# Altium PCB POWR0011_BCR_PROTOTYPE.PcbDoc (part 2 of 2)
Units mil, origin at the board's own origin, x right, y up, seen from the top; angles counter-clockwise.
Board outline 7874.02 x 3346.46 mil, 4 copper layers (Top Layer, Internal Plane 1, Internal Plane 2, Bottom Layer); 193 components, 127 nets, 685 pads, 316 vias.
Unrouted connection lines stored in the file: 1.
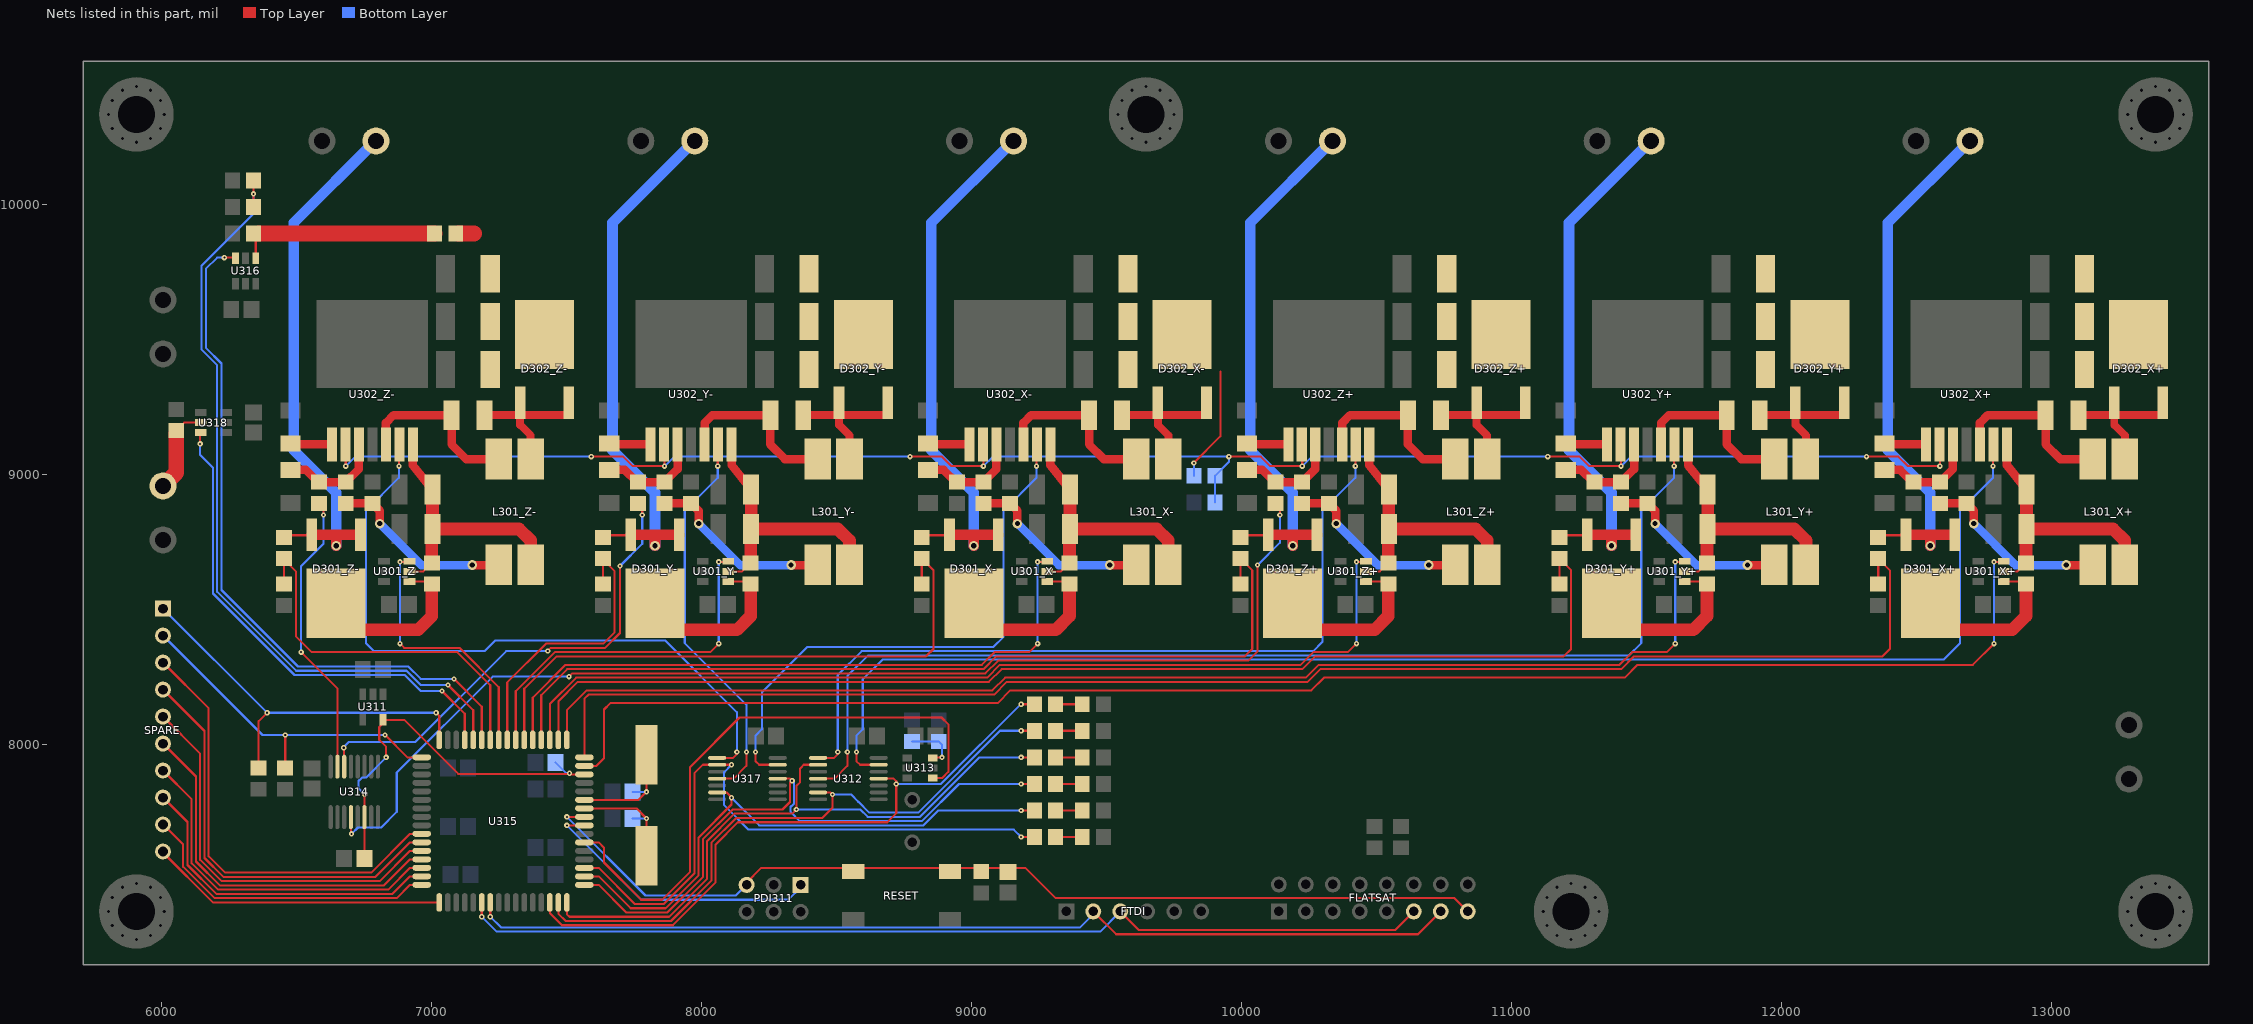
[diagram p4: the nets of this part, all layers, seen from the top]

## Via types
v1: diameter 19.68, hole 7.87, Top Layer to Bottom Layer, tented both sides, 194 vias
v2: diameter 35.43, hole 19.68, Top Layer to Bottom Layer, tented both sides, 66 vias
v3: diameter 19.68, hole 11.81, Top Layer to Bottom Layer, tented bottom, 54 vias
v4: diameter 19.68, hole 7.87, Top Layer to Bottom Layer, 2 vias

## Nets (pads, with @x,y where several pads share a name; then routed paths per layer and width w, separated by ;. In a path a pad name is that pad's centre, name@x,y a point inside that pad or via, vN(x,y) a via of type N, cw(c..) or ccw(c..) an arc to the next point about the centre after c; other vN are vias at no path point) (continued)
I_SET_Y-: R306_Y-.2 U314.14 | length 1772.1
  Top Layer w7.87: v1(6673.82,7988.19) 6675.1,7986.91 U314.14@6675.1,7918.31 ; v1(7429.13,8346.46) 7440.94,8358.27 7641.73,8358.27 7696.85,8413.39 v1(7696.85,8661.42) ; v1(7779.53,8850.39) R306_Y-.2@7779.53,8879.92
  Bottom Layer w7.87: v1(6673.82,7988.19) 6673.82,7991.25 6692.41,8009.84 6938.98,8009.84 7275.59,8346.46 v1(7429.13,8346.46) ; v1(7696.85,8661.42) 7779.53,8744.09 v1(7779.53,8850.39)
I_SET_Z+: R306_Z+.2 U314.4 | length 4357
  Top Layer w7.87: U314.4@6700.1,7731.3 6700.1,7671.85 v1(6702.66,7669.29) ; v1(7507.87,8251.97) 7519.68,8263.78 9050.45,8263.78 9097.69,8311.02 10023.9,8311.02 10059.06,8346.18 v1(10059.06,8665.35) ; v1(10141.73,8850.39) R306_Z+.2@10141.73,8879.92
  Bottom Layer w7.87: v1(6702.66,7669.29) 6726.28,7692.91 6812.12,7692.91 6870.08,7750.87 6870.08,7896.4 7225.64,8251.97 v1(7507.87,8251.97) ; v1(10059.06,8665.35) 10141.73,8748.03 v1(10141.73,8850.39) v1@10141.73,8854.33
I_SET_Z-: R306_Z-.2 U314.15 | length 1051.5
  Top Layer w7.87: v1(6515.75,8342.52) 6650.1,8208.17 U314.15@6650.1,7918.31 ; v1(6598.43,8850.39) R306_Z-.2@6598.43,8879.92
  Bottom Layer w7.87: v1(6515.75,8342.52) 6515.75,8661.42 6598.43,8744.09 v1(6598.43,8850.39)
ISENSE_BCR: U315.11 U316.6 | length 2607.9
  Top Layer w7.87: v1(6231.3,9804.13) 6270.67,9804.13 U316.6@6272.64,9802.17 ; v1(7081.94,8243.36) 7185.04,8140.27 U315.11@7185.04,8017.72
  Bottom Layer w7.87: v1(6231.3,9804.13) 6204.36,9804.13 6162.71,9762.49 6162.71,9469.8 6220.47,9412.03 6220.47,8572.83 6503.94,8289.37 6912.65,8289.37 6958.66,8243.36 v1(7081.94,8243.36)
ISENSE_LOAD: U315.13 U318.6 | length 1830.2
  Top Layer w7.87: v1(6141.73,9114.17) 6141.73,9153.54 U318.6@6143.7,9155.51 ; v1(7037.4,8198.82) 7122.05,8114.17 U315.13@7122.05,8017.72
  Bottom Layer w7.87: v1(6141.73,9114.17) 6141.73,9072.83 6188.98,9025.59 6188.98,8559.79 6490.89,8257.87 6899.61,8257.87 6958.66,8198.82 v1(7037.4,8198.82)
ISENSE_X+: U301_X+.6 U315.63 | length 5848.7
  Top Layer w7.87: U315.63@7564.96,7921.26 7610.24,7921.26 7637.8,7948.82 7637.8,8129.92 7661.42,8153.54 9096.11,8153.54 9143.35,8200.79 10257.64,8200.79 10304.89,8248.03 11419.18,8248.03 11466.42,8295.28 12708.66,8295.28 v1(12787.4,8374.02) ; v1(12787.4,8677.17) U301_X+.6@12816.93,8677.17
  Bottom Layer w7.87: v1(12787.4,8374.02) v1(12787.4,8677.17)
ISENSE_X-: U301_X-.6 U315.5 | length 2441.9
  Top Layer w7.87: U315.5@7374.02,8017.72 7374.02,8174.1 7495.19,8295.28 9037.4,8295.28 9084.65,8342.52 9212.6,8342.52 v1(9244.09,8374.02) ; v1(9244.09,8677.17) U301_X-.6@9273.62,8677.17
  Bottom Layer w7.87: v1(9244.09,8374.02) v1(9244.09,8677.17)
ISENSE_Y+: U301_Y+.6 U315.1 | length 4650.5
  Top Layer w7.87: U315.1@7500,8017.72 7500,8126.86 7573.93,8200.79 9076.54,8200.79 9123.78,8248.03 10238.07,8248.03 10285.32,8295.28 11399.61,8295.28 11446.85,8342.52 11574.8,8342.52 v1(11606.3,8374.02) ; v1(11606.3,8677.17) U301_Y+.6@11635.83,8677.17
  Bottom Layer w7.87: v1(11606.3,8374.02) v1(11606.3,8677.17)
ISENSE_Y-: U301_Y-.6 U315.7 | length 1337.7
  Top Layer w7.87: U315.7@7311.02,8017.72 7311.02,8197.72 7455.82,8342.52 8031.5,8342.52 v1(8062.99,8374.02) ; v1(8062.99,8677.17) U301_Y-.6@8092.52,8677.17
  Bottom Layer w7.87: v1(8062.99,8374.02) v1(8062.99,8677.17)
ISENSE_Z+: U301_Z+.6 U315.3 | length 3546.2
  Top Layer w7.87: U315.3@7437.01,8017.72 7437.01,8150.48 7534.56,8248.03 9056.97,8248.03 9104.21,8295.28 10218.5,8295.28 10265.75,8342.52 10393.7,8342.52 v1(10425.2,8374.02) ; v1(10425.2,8677.17) U301_Z+.6@10454.72,8677.17
  Bottom Layer w7.87: v1(10425.2,8374.02) v1(10425.2,8677.17)
ISENSE_Z-: U301_Z-.6 U315.9 | length 960.6
  Top Layer w7.87: v1(6881.89,8374.02) 6897.64,8358.27 7102.36,8358.27 7248.03,8212.6 U315.9@7248.03,8017.72 ; v1(6881.89,8677.17) U301_Z-.6@6911.42,8677.17
  Bottom Layer w7.87: v1(6881.89,8374.02) v1(6881.89,8677.17)
LOAD: LOAD.1 R318.1 U318.5 | length 318.4
  Top Layer w7.87: R318.1@6053.15,9163.39 6082.68,9192.91 U318.5@6143.7,9192.91
  Top Layer w59.06: LOAD.1@6003.94,8958.27 6053.15,9007.48 R318.1@6053.15,9153.54
NetC301_X+_1: C301_X+.1 C302_X+.1 L301_X+.2 R301_X+.1 U301_X+.5 U302_X+.7 | length 1032.7
  Top Layer w7.87: U301_X+.5@12822.83,8641.73 12874.02,8641.73 R301_X+.1@12905.51,8673.23
  Top Layer w31.5: U302_X+.7@12835.04,9112.2 12835.04,9035.04 C302_X+.1@12907.48,8944.88
  Top Layer w47.24: R301_X+.1@12905.51,8673.23 12905.51,8797.24 C301_X+.1@12907.48,8799.21 ; C302_X+.1@12907.48,8944.88 C301_X+.1@12907.48,8799.21 ; L301_X+.2@13271.65,8666.34 13271.65,8755.91 13228.35,8799.21 C301_X+.1@12907.48,8799.21
NetC301_X-_1: C301_X-.1 C302_X-.1 L301_X-.2 R301_X-.1 U301_X-.5 U302_X-.7 | length 1032.7
  Top Layer w7.87: U301_X-.5@9279.53,8641.73 9330.71,8641.73 R301_X-.1@9362.2,8673.23
  Top Layer w31.5: U302_X-.7@9291.73,9112.2 9291.73,9035.04 C302_X-.1@9364.17,8944.88
  Top Layer w47.24: R301_X-.1@9362.2,8673.23 9362.2,8797.24 C301_X-.1@9364.17,8799.21 ; C302_X-.1@9364.17,8944.88 C301_X-.1@9364.17,8799.21 ; L301_X-.2@9728.35,8666.34 9728.35,8755.91 9685.04,8799.21 C301_X-.1@9364.17,8799.21
NetC301_Y+_1: C301_Y+.1 C302_Y+.1 L301_Y+.2 R301_Y+.1 U301_Y+.5 U302_Y+.7 | length 1032.7
  Top Layer w7.87: U301_Y+.5@11641.73,8641.73 11692.91,8641.73 R301_Y+.1@11724.41,8673.23
  Top Layer w31.5: U302_Y+.7@11653.94,9112.2 11653.94,9035.04 C302_Y+.1@11726.38,8944.88
  Top Layer w47.24: R301_Y+.1@11724.41,8673.23 11724.41,8797.24 C301_Y+.1@11726.38,8799.21 ; C302_Y+.1@11726.38,8944.88 C301_Y+.1@11726.38,8799.21 ; L301_Y+.2@12090.55,8666.34 12090.55,8755.91 12047.24,8799.21 C301_Y+.1@11726.38,8799.21
NetC301_Y-_1: C301_Y-.1 C302_Y-.1 L301_Y-.2 R301_Y-.1 U301_Y-.5 U302_Y-.7 | length 1032.7
  Top Layer w7.87: U301_Y-.5@8098.43,8641.73 8149.61,8641.73 R301_Y-.1@8181.1,8673.23
  Top Layer w31.5: U302_Y-.7@8110.63,9112.2 8110.63,9035.04 C302_Y-.1@8183.07,8944.88
  Top Layer w47.24: R301_Y-.1@8181.1,8673.23 8181.1,8797.24 C301_Y-.1@8183.07,8799.21 ; C302_Y-.1@8183.07,8944.88 C301_Y-.1@8183.07,8799.21 ; L301_Y-.2@8547.24,8666.34 8547.24,8755.91 8503.94,8799.21 C301_Y-.1@8183.07,8799.21
NetC301_Z+_1: C301_Z+.1 C302_Z+.1 L301_Z+.2 R301_Z+.1 U301_Z+.5 U302_Z+.7 | length 1032.7
  Top Layer w7.87: U301_Z+.5@10460.63,8641.73 10511.81,8641.73 R301_Z+.1@10543.31,8673.23
  Top Layer w31.5: U302_Z+.7@10472.83,9112.2 10472.83,9035.04 C302_Z+.1@10545.28,8944.88
  Top Layer w47.24: R301_Z+.1@10543.31,8673.23 10543.31,8797.24 C301_Z+.1@10545.28,8799.21 ; C302_Z+.1@10545.28,8944.88 C301_Z+.1@10545.28,8799.21 ; L301_Z+.2@10909.45,8666.34 10909.45,8755.91 10866.14,8799.21 C301_Z+.1@10545.28,8799.21
NetC301_Z-_1: C301_Z-.1 C302_Z-.1 L301_Z-.2 R301_Z-.1 U301_Z-.5 U302_Z-.7 | length 1032.7
  Top Layer w7.87: U301_Z-.5@6917.32,8641.73 6968.5,8641.73 R301_Z-.1@7000,8673.23
  Top Layer w31.5: U302_Z-.7@6929.53,9112.2 6929.53,9035.04 C302_Z-.1@7001.97,8944.88
  Top Layer w47.24: R301_Z-.1@7000,8673.23 7000,8797.24 C301_Z-.1@7001.97,8799.21 ; C302_Z-.1@7001.97,8944.88 C301_Z-.1@7001.97,8799.21 ; L301_Z-.2@7366.14,8666.34 7366.14,8755.91 7322.83,8799.21 C301_Z-.1@7001.97,8799.21
NetC303_X+_1: C303_X+.1 D302_X+.1 L301_X+.3 | length 536.8
  Top Layer w29.53: C303_X+.1@13100.39,9220.47 D302_X+.1@13232.68,9220.47 ; D302_X+.1@13232.68,9265.75 D302_X+.1@13232.68,9220.47 ; L301_X+.3@13271.65,9058.07 13271.65,9145.67 13232.68,9184.65 D302_X+.1@13232.68,9220.47 ; D302_X+.1@13413.39,9220.47 D302_X+.1@13232.68,9220.47
NetC303_X+_2: C303_X+.2 L301_X+.4 U302_X+.5 | length 640.6
  Top Layer w31.5: U302_X+.5@12735.04,9112.2 12735.04,9191.73 12763.78,9220.47 C303_X+.2@12978.35,9220.47 12978.35,9112.2 13032.48,9058.07 L301_X+.4@13153.54,9058.07
NetC303_X-_1: C303_X-.1 D302_X-.1 L301_X-.3 | length 536.8
  Top Layer w29.53: C303_X-.1@9557.09,9220.47 D302_X-.1@9689.37,9220.47 ; D302_X-.1@9689.37,9265.75 D302_X-.1@9689.37,9220.47 ; L301_X-.3@9728.35,9058.07 9728.35,9145.67 9689.37,9184.65 D302_X-.1@9689.37,9220.47 ; D302_X-.1@9870.08,9220.47 D302_X-.1@9689.37,9220.47
NetC303_X-_2: C303_X-.2 L301_X-.4 U302_X-.5 | length 640.6
  Top Layer w31.5: U302_X-.5@9191.73,9112.2 9191.73,9191.73 9220.47,9220.47 C303_X-.2@9435.04,9220.47 9435.04,9112.2 9489.17,9058.07 L301_X-.4@9610.24,9058.07
NetC303_Y+_1: C303_Y+.1 D302_Y+.1 L301_Y+.3 | length 536.8
  Top Layer w29.53: C303_Y+.1@11919.29,9220.47 D302_Y+.1@12051.57,9220.47 ; D302_Y+.1@12051.57,9265.75 D302_Y+.1@12051.57,9220.47 ; L301_Y+.3@12090.55,9058.07 12090.55,9145.67 12051.57,9184.65 D302_Y+.1@12051.57,9220.47 ; D302_Y+.1@12232.28,9220.47 D302_Y+.1@12051.57,9220.47
NetC303_Y+_2: C303_Y+.2 L301_Y+.4 U302_Y+.5 | length 640.6
  Top Layer w31.5: U302_Y+.5@11553.94,9112.2 11553.94,9191.73 11582.68,9220.47 C303_Y+.2@11797.24,9220.47 11797.24,9112.2 11851.38,9058.07 L301_Y+.4@11972.44,9058.07
NetC303_Y-_1: C303_Y-.1 D302_Y-.1 L301_Y-.3 | length 536.8
  Top Layer w29.53: C303_Y-.1@8375.98,9220.47 D302_Y-.1@8508.27,9220.47 ; D302_Y-.1@8508.27,9265.75 D302_Y-.1@8508.27,9220.47 ; L301_Y-.3@8547.24,9058.07 8547.24,9145.67 8508.27,9184.65 D302_Y-.1@8508.27,9220.47 ; D302_Y-.1@8688.98,9220.47 D302_Y-.1@8508.27,9220.47
NetC303_Y-_2: C303_Y-.2 L301_Y-.4 U302_Y-.5 | length 640.6
  Top Layer w31.5: U302_Y-.5@8010.63,9112.2 8010.63,9191.73 8039.37,9220.47 C303_Y-.2@8253.94,9220.47 8253.94,9112.2 8308.07,9058.07 L301_Y-.4@8429.13,9058.07
NetC303_Z+_1: C303_Z+.1 D302_Z+.1 L301_Z+.3 | length 536.8
  Top Layer w29.53: C303_Z+.1@10738.19,9220.47 D302_Z+.1@10870.47,9220.47 ; D302_Z+.1@10870.47,9265.75 D302_Z+.1@10870.47,9220.47 ; L301_Z+.3@10909.45,9058.07 10909.45,9145.67 10870.47,9184.65 D302_Z+.1@10870.47,9220.47 ; D302_Z+.1@11051.18,9220.47 D302_Z+.1@10870.47,9220.47
NetC303_Z+_2: C303_Z+.2 L301_Z+.4 U302_Z+.5 | length 640.6
  Top Layer w31.5: U302_Z+.5@10372.83,9112.2 10372.83,9191.73 10401.57,9220.47 C303_Z+.2@10616.14,9220.47 10616.14,9112.2 10670.28,9058.07 L301_Z+.4@10791.34,9058.07
NetC303_Z-_1: C303_Z-.1 D302_Z-.1 L301_Z-.3 | length 536.8
  Top Layer w29.53: C303_Z-.1@7194.88,9220.47 D302_Z-.1@7327.17,9220.47 ; D302_Z-.1@7327.17,9265.75 D302_Z-.1@7327.17,9220.47 ; L301_Z-.3@7366.14,9058.07 7366.14,9145.67 7327.17,9184.65 D302_Z-.1@7327.17,9220.47 ; D302_Z-.1@7507.87,9220.47 D302_Z-.1@7327.17,9220.47
NetC303_Z-_2: C303_Z-.2 L301_Z-.4 U302_Z-.5 | length 640.6
  Top Layer w31.5: U302_Z-.5@6829.53,9112.2 6829.53,9191.73 6858.27,9220.47 C303_Z-.2@7072.83,9220.47 7072.83,9112.2 7126.97,9058.07 L301_Z-.4@7248.03,9058.07
NetC305_X+_1: C305_X+.1 U302_X+.1 | length 149.2
  Top Layer w31.5: C305_X+.1@12385.83,9112.2 U302_X+.1@12535.04,9112.2
NetC305_X-_1: C305_X-.1 U302_X-.1 | length 149.2
  Top Layer w31.5: C305_X-.1@8842.52,9112.2 U302_X-.1@8991.73,9112.2
NetC305_Y+_1: C305_Y+.1 U302_Y+.1 | length 149.2
  Top Layer w31.5: C305_Y+.1@11204.72,9112.2 U302_Y+.1@11353.94,9112.2
NetC305_Y-_1: C305_Y-.1 U302_Y-.1 | length 149.2
  Top Layer w31.5: C305_Y-.1@7661.42,9112.2 U302_Y-.1@7810.63,9112.2
NetC305_Z+_1: C305_Z+.1 U302_Z+.1 | length 149.2
  Top Layer w31.5: C305_Z+.1@10023.62,9112.2 U302_Z+.1@10172.83,9112.2
NetC305_Z-_1: C305_Z-.1 U302_Z-.1 | length 149.2
  Top Layer w31.5: C305_Z-.1@6480.31,9112.2 U302_Z-.1@6629.53,9112.2
NetC306_X+_1: C306_X+.1 C306_X-.1 C306_Y+.1 C306_Y-.1 C306_Z+.1 C306_Z-.1 C307_X+.1 C307_X-.1 C307_Y+.1 C307_Y-.1 C307_Z+.1 C307_Z-.1 C308_X+.1 C308_X-.1 C308_Y+.1 C308_Y-.1 C308_Z+.1 C308_Z-.1 D302_X+.2 D302_X-.2 D302_Y+.2 D302_Y-.2 D302_Z+.2 D302_Z-.2 FB311.1 R313.2 | length 484.7
  Top Layer w7.87: v1(9822.83,9043.31) 9921.26,9141.73 9921.26,9381.89
  Top Layer w59.06: FB311.1@7098.43,9892.72 7156.5,9892.72
  Bottom Layer w7.87: R313.2@9822.83,8996.06 v1(9822.83,9043.31)
NetC309_X+_2: C309_X+.2 R304_X+.2 R306_X+.1 U302_X+.3 | length 383.3
  Top Layer w7.87: R306_X+.1@12484.25,8972.44 R306_X+.1@12488.19,8972.44
  Top Layer w31.5: C309_X+.2@12381.89,9017.72 12438.98,9017.72 R306_X+.1@12484.25,8972.44 ; R306_X+.1@12488.19,8972.44 R304_X+.2@12586.61,8972.44 12635.04,9020.87 U302_X+.3@12635.04,9112.2
NetC309_X-_2: C309_X-.2 R304_X-.2 R306_X-.1 U302_X-.3 | length 383.3
  Top Layer w7.87: R306_X-.1@8940.94,8972.44 R306_X-.1@8944.88,8972.44
  Top Layer w31.5: C309_X-.2@8838.58,9017.72 8895.67,9017.72 R306_X-.1@8940.94,8972.44 ; R306_X-.1@8944.88,8972.44 R304_X-.2@9043.31,8972.44 9091.73,9020.87 U302_X-.3@9091.73,9112.2
NetC309_Y+_2: C309_Y+.2 R304_Y+.2 R306_Y+.1 U302_Y+.3 | length 383.3
  Top Layer w7.87: R306_Y+.1@11303.15,8972.44 R306_Y+.1@11307.09,8972.44
  Top Layer w31.5: C309_Y+.2@11200.79,9017.72 11257.87,9017.72 R306_Y+.1@11303.15,8972.44 ; R306_Y+.1@11307.09,8972.44 R304_Y+.2@11405.51,8972.44 11453.94,9020.87 U302_Y+.3@11453.94,9112.2
NetC309_Y-_2: C309_Y-.2 R304_Y-.2 R306_Y-.1 U302_Y-.3 | length 383.3
  Top Layer w7.87: R306_Y-.1@7759.84,8972.44 R306_Y-.1@7763.78,8972.44
  Top Layer w31.5: C309_Y-.2@7657.48,9017.72 7714.57,9017.72 R306_Y-.1@7759.84,8972.44 ; R306_Y-.1@7763.78,8972.44 R304_Y-.2@7862.2,8972.44 7910.63,9020.87 U302_Y-.3@7910.63,9112.2
NetC309_Z+_2: C309_Z+.2 R304_Z+.2 R306_Z+.1 U302_Z+.3 | length 383.3
  Top Layer w7.87: R306_Z+.1@10122.05,8972.44 R306_Z+.1@10125.98,8972.44
  Top Layer w31.5: C309_Z+.2@10019.69,9017.72 10076.77,9017.72 R306_Z+.1@10122.05,8972.44 ; R306_Z+.1@10125.98,8972.44 R304_Z+.2@10224.41,8972.44 10272.83,9020.87 U302_Z+.3@10272.83,9112.2
NetC309_Z-_2: C309_Z-.2 R304_Z-.2 R306_Z-.1 U302_Z-.3 | length 383.3
  Top Layer w7.87: R306_Z-.1@6578.74,8972.44 R306_Z-.1@6582.68,8972.44
  Top Layer w31.5: C309_Z-.2@6476.38,9017.72 6533.46,9017.72 R306_Z-.1@6578.74,8972.44 ; R306_Z-.1@6582.68,8972.44 R304_Z-.2@6681.1,8972.44 6729.53,9020.87 U302_Z-.3@6729.53,9112.2
NetC326_1: C326.1 U315.58 X311.2 | length 434.8
  Top Layer w7.87: U315.58@7564.96,7763.78 7757.87,7763.78 v1(7795.28,7726.38) X311.2@7795.28,7588.58
  Bottom Layer w7.87: C326.1@7744.09,7726.38 v1(7795.28,7726.38)
NetC327_2: C327.2 U315.59 X311.1 | length 431.5
  Top Layer w7.87: U315.59@7564.96,7795.28 7765.75,7795.28 v1(7795.28,7824.8) X311.1@7795.28,7962.6
  Bottom Layer w7.87: C327.2@7744.09,7824.8 v1(7795.28,7824.8)
NetD301_X+_2: D301_X+.2 R301_X+.2 U301_X+.4 | length 477.9
  Top Layer w7.87: U301_X+.4@12822.83,8604.33 R301_X+.2@12905.51,8604.33
  Top Layer w47.24: D301_X+.2@12649.61,8425.2 12854.33,8425.2 12905.51,8476.38 R301_X+.2@12905.51,8594.49
NetD301_X-_2: D301_X-.2 R301_X-.2 U301_X-.4 | length 477.9
  Top Layer w7.87: U301_X-.4@9279.53,8604.33 R301_X-.2@9362.2,8604.33
  Top Layer w47.24: D301_X-.2@9106.3,8425.2 9311.02,8425.2 9362.2,8476.38 R301_X-.2@9362.2,8594.49
NetD301_Y+_2: D301_Y+.2 R301_Y+.2 U301_Y+.4 | length 477.9
  Top Layer w7.87: U301_Y+.4@11641.73,8604.33 R301_Y+.2@11724.41,8604.33
  Top Layer w47.24: D301_Y+.2@11468.5,8425.2 11673.23,8425.2 11724.41,8476.38 R301_Y+.2@11724.41,8594.49
NetD301_Y-_2: D301_Y-.2 R301_Y-.2 U301_Y-.4 | length 477.9
  Top Layer w7.87: U301_Y-.4@8098.43,8604.33 R301_Y-.2@8181.1,8604.33
  Top Layer w47.24: D301_Y-.2@7925.2,8425.2 8129.92,8425.2 8181.1,8476.38 R301_Y-.2@8181.1,8594.49
NetD301_Z+_2: D301_Z+.2 R301_Z+.2 U301_Z+.4 | length 477.9
  Top Layer w7.87: U301_Z+.4@10460.63,8604.33 R301_Z+.2@10543.31,8604.33
  Top Layer w47.24: D301_Z+.2@10287.4,8425.2 10492.13,8425.2 10543.31,8476.38 R301_Z+.2@10543.31,8594.49
NetD301_Z-_2: D301_Z-.2 R301_Z-.2 U301_Z-.4 | length 477.9
  Top Layer w7.87: U301_Z-.4@6917.32,8604.33 R301_Z-.2@7000,8604.33
  Top Layer w47.24: D301_Z-.2@6744.09,8425.2 6948.82,8425.2 7000,8476.38 R301_Z-.2@7000,8594.49
NetFB311_2: FB311.2 R315.1 U316.4 | length 746
  Top Layer w7.87: U316.4@6347.44,9802.17 6347.44,9880.91 R315.1@6359.25,9892.72
  Top Layer w59.06: R315.1@6359.25,9892.72 FB311.2@7009.84,9892.72
NetL301_X+_1: L301_X+.1 R304_X+.1 R305_X+.2 | length 689.6
  Top Layer w31.5: R304_X+.1@12586.61,8893.7 R305_X+.2@12685.04,8893.7 12712.6,8866.14 v2(12712.6,8818.9) ; v2(13055.12,8665.35) 13152.56,8665.35 L301_X+.1@13153.54,8666.34
  Bottom Layer w31.5: v2(12712.6,8818.9) 12866.14,8665.35 v2(13055.12,8665.35)
NetL301_X-_1: L301_X-.1 R304_X-.1 R305_X-.2 | length 689.6
  Top Layer w31.5: R304_X-.1@9043.31,8893.7 R305_X-.2@9141.73,8893.7 9169.29,8866.14 v2(9169.29,8818.9) ; v2(9511.81,8665.35) 9609.25,8665.35 L301_X-.1@9610.24,8666.34
  Bottom Layer w31.5: v2(9169.29,8818.9) 9322.83,8665.35 v2(9511.81,8665.35)
NetL301_Y+_1: L301_Y+.1 R304_Y+.1 R305_Y+.2 | length 689.6
  Top Layer w31.5: R304_Y+.1@11405.51,8893.7 R305_Y+.2@11503.94,8893.7 11531.5,8866.14 v2(11531.5,8818.9) ; v2(11874.02,8665.35) 11971.46,8665.35 L301_Y+.1@11972.44,8666.34
  Bottom Layer w31.5: v2(11531.5,8818.9) 11685.04,8665.35 v2(11874.02,8665.35)
NetL301_Y-_1: L301_Y-.1 R304_Y-.1 R305_Y-.2 | length 689.6
  Top Layer w31.5: R304_Y-.1@7862.2,8893.7 R305_Y-.2@7960.63,8893.7 7988.19,8866.14 v2(7988.19,8818.9) ; v2(8330.71,8665.35) 8428.15,8665.35 L301_Y-.1@8429.13,8666.34
  Bottom Layer w31.5: v2(7988.19,8818.9) 8141.73,8665.35 v2(8330.71,8665.35)
NetL301_Z+_1: L301_Z+.1 R304_Z+.1 R305_Z+.2 | length 689.6
  Top Layer w31.5: R304_Z+.1@10224.41,8893.7 R305_Z+.2@10322.83,8893.7 10350.39,8866.14 v2(10350.39,8818.9) ; v2(10692.91,8665.35) 10790.35,8665.35 L301_Z+.1@10791.34,8666.34
  Bottom Layer w31.5: v2(10350.39,8818.9) 10503.94,8665.35 v2(10692.91,8665.35)
NetL301_Z-_1: L301_Z-.1 R304_Z-.1 R305_Z-.2 | length 689.6
  Top Layer w31.5: R304_Z-.1@6681.1,8893.7 R305_Z-.2@6779.53,8893.7 6807.09,8866.14 v2(6807.09,8818.9) ; v2(7149.61,8665.35) 7247.05,8665.35 L301_Z-.1@7248.03,8666.34
  Bottom Layer w31.5: v2(6807.09,8818.9) 6960.63,8665.35 v2(7149.61,8665.35)
NetR311_2: R311.2 R312.2 U313.3 | length 196.6
  Top Layer w7.87: U313.3@8856.3,7950.79 8858.25,7952.74 v1(8889.75,7952.74)
  Bottom Layer w7.87: R312.2@8779.53,8011.81 R311.2@8877.95,8011.81 8889.75,8000.02 v1(8889.75,7952.74)
NetR319_2: R319.2 SPARE.1 U315.16 | length 1494.7
  Top Layer w7.87: R319.2@6358.27,7913.39 6358.27,8086.58 v1(6389.78,8118.09) ; v1(7015.73,8118.09) 7027.56,8106.27 U315.16@7027.56,8017.72
  Bottom Layer w7.87: SPARE.1@6003.94,8503.94 v1(6389.78,8118.09) v1(7015.73,8118.09)
NetR320_2: R320.2 SPARE.2 U315.17 | length 1267.6
  Top Layer w7.87: R320.2@6456.69,7913.39 v1(6456.69,8035.43) ; v1(6826.77,8035.43) 6909.45,7952.76 U315.17@6962.6,7952.76
  Bottom Layer w7.87: SPARE.2@6003.94,8403.94 6372.44,8035.43 v1(6456.69,8035.43) v1(6826.77,8035.43)
NetR324_1: R324.1 SHUTDOWN_Z-.1 | length 98.4
  Top Layer w7.87: R324.1@9311.02,7657.48 SHUTDOWN_Z-.1@9409.45,7657.48
NetR325_1: R325.1 SHUTDOWN_Y-.1 | length 98.4
  Top Layer w7.87: R325.1@9311.02,7755.91 SHUTDOWN_Y-.1@9409.45,7755.91
NetR326_1: R326.1 SHUTDOWN_X-.1 | length 98.4
  Top Layer w7.87: R326.1@9311.02,7854.33 SHUTDOWN_X-.1@9409.45,7854.33
NetR327_1: R327.1 SHUTDOWN_Z+.1 | length 98.4
  Top Layer w7.87: R327.1@9311.02,7952.76 SHUTDOWN_Z+.1@9409.45,7952.76
NetR328_1: R328.1 SHUTDOWN_Y+.1 | length 98.4
  Top Layer w7.87: R328.1@9311.02,8051.18 SHUTDOWN_Y+.1@9409.45,8051.18
NetR329_1: R329.1 SHUTDOWN_X+.1 | length 98.4
  Top Layer w7.87: R329.1@9311.02,8149.61 SHUTDOWN_X+.1@9409.45,8149.61
NetSPARE_3: SPARE.3 U315.26 | length 1661.6
  Top Layer w7.87: SPARE.3@6003.94,8303.94 6173.23,8134.65 6173.23,7586.61 6234.25,7525.59 6775.58,7525.59 6919.28,7669.29 U315.26@6962.6,7669.29
NetSPARE_4: SPARE.4 U315.27 | length 1574.7
  Top Layer w7.87: SPARE.4@6003.94,8203.94 6157.48,8050.39 6157.48,7580.09 6227.73,7509.84 6791.32,7509.84 6919.28,7637.8 U315.27@6962.6,7637.8
NetSPARE_5: SPARE.5 U315.28 | length 1487.7
  Top Layer w7.87: SPARE.5@6003.94,8103.94 6141.73,7966.14 6141.73,7573.57 6221.21,7494.09 6807.07,7494.09 6919.28,7606.3 U315.28@6962.6,7606.3
NetSPARE_6: SPARE.6 U315.29 | length 1400.8
  Top Layer w7.87: SPARE.6@6003.94,8003.94 6125.98,7881.89 6125.98,7567.05 6214.68,7478.35 6822.82,7478.35 6919.28,7574.8 U315.29@6962.6,7574.8
NetSPARE_7: SPARE.7 U315.30 | length 1313.8
  Top Layer w7.87: SPARE.7@6003.94,7903.94 6110.24,7797.64 6110.24,7560.52 6208.16,7462.6 6838.57,7462.6 6919.28,7543.31 U315.30@6962.6,7543.31
NetSPARE_8: SPARE.8 U315.31 | length 1226.8
  Top Layer w7.87: SPARE.8@6003.94,7803.94 6094.49,7713.39 6094.49,7554 6201.64,7446.85 6854.32,7446.85 6919.28,7511.81 U315.31@6962.6,7511.81
NetSPARE_9: SPARE.9 U315.32 | length 1140.4
  Top Layer w7.87: SPARE.9@6003.94,7703.94 6004.72,7703.94 6078.74,7629.92 6078.74,7547.48 6195.11,7431.1 6870.06,7431.1 6919.28,7480.31 U315.32@6962.6,7480.31
NetSPARE_10: SPARE.10 U315.33 | length 1102.9
  Top Layer w7.87: SPARE.10@6001.97,7601.97 6188.59,7415.35 U315.33@7027.56,7415.35
NetU302_X+_6: U302_X+.6 U312.13 | length 5257.3
  Top Layer w7.87: v1(8572.83,7972.44) 8572.83,7938.98 8586.61,7925.2 U312.13@8655.51,7925.2 ; v1(12783.46,9031.5) U302_X+.6@12783.46,9061.02
  Bottom Layer w7.87: v1(8572.83,7972.44) 8572.83,8033.46 8596.46,8057.09 8596.46,8242.13 8669.29,8314.96 12600.39,8314.96 12661.42,8375.98 12661.42,8866.14 12783.46,8988.19 v1(12783.46,9031.5)
NetU302_X-_6: U302_X-.6 U317.13 | length 2045.4
  Top Layer w7.87: v1(8198.82,7972.44) 8198.82,7938.98 8212.6,7925.2 U317.13@8281.5,7925.2 ; v1(9240.16,9031.5) U302_X-.6@9240.16,9061.02
  Bottom Layer w7.87: v1(8198.82,7972.44) 8198.82,8033.46 8222.44,8057.09 8222.44,8192.91 8391.73,8362.2 9080.71,8362.2 9118.11,8399.61 9118.11,8866.14 9240.16,8988.19 v1(9240.16,9031.5)
NetU302_Y+_6: U302_Y+.6 U312.4 | length 4187.6
  Top Layer w7.87: U312.4@8431.1,7874.02 8492.13,7874.02 8539.37,7921.26 v1(8539.37,7972.44) ; v1(11602.36,9031.5) U302_Y+.6@11602.36,9061.02
  Bottom Layer w7.87: v1(8539.37,7972.44) 8539.37,8253.94 8616.14,8330.71 11435.04,8330.71 11480.32,8375.98 11480.32,8866.14 11602.36,8988.19 v1(11602.36,9031.5)
NetU302_Y-_6: U302_Y-.6 U317.4 | length 1412.7
  Top Layer w7.87: U317.4@8057.09,7874.02 8118.11,7874.02 8165.35,7921.26 v1(8165.35,7972.44) ; v1(8059.06,9031.5) U302_Y-.6@8059.06,9061.02
  Bottom Layer w7.87: v1(8059.06,9031.5) 8059.06,8988.19 7937.01,8866.14 7937.01,8375.98 8165.35,8147.64 v1(8165.35,7972.44)
NetU302_Z+_6: U302_Z+.6 U312.1 | length 2949.3
  Top Layer w7.87: U312.1@8431.1,7950.79 8490.16,7950.79 8503.94,7964.57 v1(8503.94,7972.44) ; v1(10421.26,9031.5) U302_Z+.6@10421.26,9061.02
  Bottom Layer w7.87: v1(8503.94,7972.44) 8503.94,8257.87 8592.52,8346.46 10265.75,8346.46 10299.21,8379.92 10299.21,8866.14 10421.26,8988.19 v1(10421.26,9031.5)
NetU302_Z-_6: U302_Z-.6 U317.1 | length 2482.3
  Top Layer w7.87: v1(6877.95,9031.5) U302_Z-.6@6877.95,9061.02 ; U317.1@8057.09,7950.79 8116.14,7950.79 8129.92,7964.57 v1(8129.92,7972.44)
  Bottom Layer w7.87: v1(6877.95,9031.5) 6877.95,8988.19 6755.91,8866.14 6755.91,8375.98 6785.43,8346.46 7194.88,8346.46 7234.25,8385.83 7864.17,8385.83 8129.92,8120.08 v1(8129.92,7972.44)
PANEL_X+: D301_X+.1 PANEL_X+.1 R302_X+.2 | length 2003.4
  Top Layer w7.87: R302_X+.2@12366.14,8775.59 D301_X+.1@12459.06,8775.59
  Top Layer w39.37: D301_X+.1@12461.02,8777.56 12551.18,8777.56 ; v2(12551.18,8737.2) 12551.18,8777.56 ; D301_X+.1@12641.34,8777.56 12551.18,8777.56
  Bottom Layer w39.37: v2(12551.18,8737.2) 12551.18,8933.07 12393.7,9090.55 12393.7,9933.07 PANEL_X+.1@12696.85,10236.22
PANEL_X-: D301_X-.1 PANEL_X-.1 R302_X-.2 | length 2003.4
  Top Layer w7.87: R302_X-.2@8822.83,8775.59 D301_X-.1@8915.75,8775.59
  Top Layer w39.37: D301_X-.1@8917.72,8777.56 9007.87,8777.56 ; v2(9007.87,8737.2) 9007.87,8777.56 ; D301_X-.1@9098.03,8777.56 9007.87,8777.56
  Bottom Layer w39.37: v2(9007.87,8737.2) 9007.87,8933.07 8850.39,9090.55 8850.39,9933.07 PANEL_X-.1@9153.54,10236.22
PANEL_Y+: D301_Y+.1 PANEL_Y+.1 R302_Y+.2 | length 2004.5
  Top Layer w7.87: R302_Y+.2@11185.04,8775.59 D301_Y+.1@11277.95,8775.59
  Top Layer w39.37: D301_Y+.1@11279.92,8777.56 11370.08,8777.56 ; v2(11370.08,8737.2) 11370.08,8777.56 ; D301_Y+.1@11460.24,8777.56 11370.08,8777.56
  Bottom Layer w39.37: v2(11370.08,8737.2) 11370.08,8933.07 11212.6,9090.55 11212.6,9933.07 PANEL_Y+.1@11516.54,10237.01
PANEL_Y-: D301_Y-.1 PANEL_Y-.1 R302_Y-.2 | length 2003.4
  Top Layer w7.87: R302_Y-.2@7641.73,8775.59 D301_Y-.1@7734.65,8775.59
  Top Layer w39.37: D301_Y-.1@7736.61,8777.56 7826.77,8777.56 ; v2(7826.77,8737.2) 7826.77,8777.56 ; D301_Y-.1@7916.93,8777.56 7826.77,8777.56
  Bottom Layer w39.37: v2(7826.77,8737.2) 7826.77,8933.07 7669.29,9090.55 7669.29,9933.07 PANEL_Y-.1@7972.44,10236.22
PANEL_Z+: D301_Z+.1 PANEL_Z+.1 R302_Z+.2 | length 2003.4
  Top Layer w7.87: R302_Z+.2@10003.94,8775.59 D301_Z+.1@10096.85,8775.59
  Top Layer w39.37: D301_Z+.1@10098.82,8777.56 10188.98,8777.56 ; v2(10188.98,8737.2) 10188.98,8777.56 ; D301_Z+.1@10279.13,8777.56 10188.98,8777.56
  Bottom Layer w39.37: v2(10188.98,8737.2) 10188.98,8933.07 10031.5,9090.55 10031.5,9933.07 PANEL_Z+.1@10334.65,10236.22
PANEL_Z-: D301_Z-.1 PANEL_Z-.1 R302_Z-.2 | length 2003.4
  Top Layer w7.87: R302_Z-.2@6460.63,8775.59 D301_Z-.1@6553.54,8775.59
  Top Layer w39.37: D301_Z-.1@6555.51,8777.56 6645.67,8777.56 ; v2(6645.67,8737.2) 6645.67,8777.56 ; D301_Z-.1@6735.83,8777.56 6645.67,8777.56
  Bottom Layer w39.37: v2(6645.67,8737.2) 6645.67,8933.07 6488.19,9090.55 6488.19,9933.07 PANEL_Z-.1@6791.34,10236.22
PDI_CLK: C328.2 FLATSAT.15 PDI311.5 R323.2 RESET.2 U315.57 | length 3678.8
  Top Layer w7.87: v1(7500,7732.28) U315.57@7564.96,7732.28 ; PDI311.5@8166.14,7470.47 8166.14,7488.98 8220.47,7543.31 8547.24,7543.31 RESET.2@8561.02,7529.53 RESET.2@8529.53,7529.53 ; RESET.2@8562.99,7543.31 9198.82,7543.31 9311.02,7431.1 10788.58,7431.1 FLATSAT.15@10837.8,7381.89
  Bottom Layer w7.87: v1(7500,7732.28) 7791.34,7440.94 8125.98,7440.94 8155.51,7470.47 PDI311.5@8166.14,7470.47
PDI_DATA: PDI311.1 U315.56 | length 1064
  Top Layer w7.87: v1(7500,7700.79) U315.56@7564.96,7700.79
  Bottom Layer w7.87: v1(7500,7700.79) 7775.59,7425.2 8320.87,7425.2 PDI311.1@8366.14,7470.47
SHDNX+: R329.2 U312.11 U315.46 | length 2397.4
  Top Layer w7.87: U315.46@7437.01,7415.35 7437.01,7375.98 7482.28,7330.71 7892.23,7330.71 8051.18,7489.66 8051.18,7630.04 8133.74,7712.6 8687.01,7712.6 8720.47,7746.06 v1(8720.47,7854.33) 8720.47,7864.17 8710.63,7874.02 U312.11@8675.2,7874.02 ; v1(9183.07,8149.61) R329.2@9232.28,8149.61
  Bottom Layer w7.87: v1(8720.47,7854.33) 8885.83,7854.33 9181.1,8149.61 v1(9183.07,8149.61)
SHDNX-: R326.2 U315.49 U317.11 | length 2292.6
  Top Layer w7.87: U315.49@7564.96,7480.31 7618.11,7480.31 7720.47,7377.95 7872.66,7377.95 8003.94,7509.23 8003.94,7649.61 8114.17,7759.84 8299.21,7759.84 8326.77,7787.4 8326.77,7858.27 v1(8334.65,7866.14) 8326.77,7874.02 U317.11@8281.5,7874.02 ; v1(9183.07,7854.33) R326.2@9232.28,7854.33
  Bottom Layer w7.87: v1(8334.65,7866.14) 8341.42,7859.36 8341.42,7781.5 8328.74,7768.81 8328.74,7750.87 8363.08,7716.54 8814.84,7716.54 8952.64,7854.33 v1(9183.07,7854.33)
SHDNY+: R328.2 U312.6 U315.47 | length 2331.4
  Top Layer w7.87: U315.47@7468.5,7415.35 7468.5,7374.02 7496.06,7346.46 7885.71,7346.46 8035.43,7496.18 8035.43,7636.56 8127.22,7728.35 8446.85,7728.35 8484.25,7765.75 v1(8484.25,7814.96) 8476.38,7822.83 U312.6@8431.1,7822.83 ; v1(9183.07,8051.18) R328.2@9232.28,8051.18
  Bottom Layer w7.87: v1(8484.25,7814.96) 8553.15,7814.96 8579.84,7788.27 8580.71,7788.27 8620.95,7748.03 8801.8,7748.03 9104.95,8051.18 v1(9183.07,8051.18)
SHDNY-: R325.2 U315.50 U317.6 | length 2110.4
  Top Layer w7.87: U315.50@7564.96,7511.81 7618.11,7511.81 7736.22,7393.7 7866.14,7393.7 7988.19,7515.75 7988.19,7656.13 8110.24,7778.18 v1(8110.24,7803.15) 8110.24,7805.12 8092.52,7822.83 U317.6@8057.09,7822.83 ; v1(9183.07,7755.91) R325.2@9232.28,7755.91
  Bottom Layer w7.87: v1(8110.24,7803.15) 8212.6,7700.79 8821.37,7700.79 8876.49,7755.91 v1(9183.07,7755.91)
SHDNZ+: R327.2 U312.2 U315.48 | length 2359.3
  Top Layer w7.87: U315.48@7500,7415.35 7500,7372.05 7509.84,7362.2 7879.19,7362.2 8019.69,7502.7 8019.69,7643.08 8120.7,7744.09 8334.65,7744.09 v1(8350.39,7759.84) 8350.39,7846.46 8364.17,7860.24 8364.17,7910.54 8366.14,7912.51 8366.14,7913.39 8377.95,7925.2 U312.2@8431.1,7925.2 ; v1(9183.07,7952.76) R327.2@9232.28,7952.76
  Bottom Layer w7.87: v1(8350.39,7759.84) 8586.87,7759.84 8614.43,7732.28 8808.32,7732.28 9028.79,7952.76 v1(9183.07,7952.76)
SHDNZ-: R324.2 U315.51 U317.2 | length 2391.5
  Top Layer w7.87: U315.51@7564.96,7543.31 7618.11,7543.31 7751.97,7409.45 7859.62,7409.45 7972.44,7522.27 7972.44,7893.7 8003.94,7925.2 U317.2@8057.09,7925.2 v1(8110.24,7925.2) ; v1(9183.07,7657.48) R324.2@9232.28,7657.48
  Bottom Layer w7.87: v1(8110.24,7925.2) 8082.68,7897.64 8082.68,7775.59 8173.23,7685.04 9155.51,7685.04 v1(9183.07,7657.48)
SYNC_EN: U313.1 U315.54 | length 2228.7
  Top Layer w7.87: U315.54@7564.96,7637.8 7618.11,7637.8 7637.8,7618.11 7637.8,7562.99 7775.59,7425.2 7853.1,7425.2 7956.69,7528.79 7956.69,7917.32 8139.76,8100.39 8887.8,8100.39 8913.39,8074.8 8913.39,7899.61 8889.76,7875.98 U313.1@8856.3,7875.98
UART_RXD: FLATSAT.11 FTDI.3 U315.38 | length 3616.8
  Top Layer w7.87: v1(7185.04,7362.2) U315.38@7185.04,7415.35 ; FTDI.3@9550.39,7381.89 9619.29,7312.99 10568.9,7312.99 FLATSAT.11@10637.8,7381.89
  Bottom Layer w7.87: v1(7185.04,7362.2) 7240.16,7307.09 9475.59,7307.09 FTDI.3@9550.39,7381.89
UART_TXD: FLATSAT.13 FTDI.2 U315.39 | length 3691.3
  Top Layer w7.87: v1(7216.54,7362.2) U315.39@7216.54,7415.35 ; FTDI.2@9450.39,7381.89 9535.04,7297.24 10653.15,7297.24 FLATSAT.13@10737.8,7381.89
  Bottom Layer w7.87: v1(7216.54,7362.2) 7255.91,7322.83 9401.57,7322.83 9450.39,7371.65 FTDI.2@9450.39,7381.89
V_FB: R313.1 R314.2 U302_X+.2 U302_X-.2 U302_Y+.2 U302_Y-.2 U302_Z+.2 U302_Z-.2 | length 6419.9
  Top Layer w7.87: v1(6681.1,9031.5) U302_Z-.2@6681.1,9061.02 ; v1(7590.55,9066.93) 7708.66,9066.93 7744.09,9031.5 v1(7862.2,9031.5) U302_Y-.2@7862.2,9061.02 ; v1(8771.65,9066.93) 8889.76,9066.93 8925.2,9031.5 v1(9043.31,9031.5) U302_X-.2@9043.31,9061.02 ; v1(9952.76,9066.93) 10070.87,9066.93 10106.3,9031.5 v1(10224.41,9031.5) U302_Z+.2@10224.41,9061.02 ; v1(11133.86,9066.93) 11251.97,9066.93 11287.4,9031.5 v1(11405.51,9031.5) U302_Y+.2@11405.51,9061.02 ; v1(12314.96,9066.93) 12433.07,9066.93 12468.5,9031.5 v1(12586.61,9031.5) U302_X+.2@12586.61,9061.02
  Bottom Layer w7.87: v1(6681.1,9031.5) 6716.54,9066.93 v1(7590.55,9066.93) ; v1(7862.2,9031.5) 7897.64,9066.93 v1(8771.65,9066.93) ; v1(9043.31,9031.5) 9078.74,9066.93 v1(9952.76,9066.93) 9952.76,9047.24 R313.1@9901.57,8996.06 R314.2@9901.57,8897.64 ; v1(10224.41,9031.5) 10259.84,9066.93 v1(11133.86,9066.93) ; v1(11405.51,9031.5) 11440.94,9066.93 v1(12314.96,9066.93)
VREF: C315.2 C316.2 U311.5 U314.6 U315.62 | length 1494.8
  Top Layer w7.87: C315.2@6750,7578.74 6750,7731.2 U314.6@6750.1,7731.3 6750.1,7813.09 v4(6751.97,7814.96) ; U311.5@6818.9,8092.52 6818.9,8078.74 6805.12,8064.96 6805.12,8017.72 6830.71,7992.13 v4(6830.71,7952.76) ; U311.5@6818.9,8102.36 6830.71,8090.55 6899.09,8090.55 7097.91,7891.73 7507.87,7891.73 v1(7509.84,7893.7) 7513.78,7889.76 U315.62@7564.96,7889.76
  Bottom Layer w7.87: v4(6751.97,7814.96) 6728.44,7838.48 6728.44,7865.17 6741.13,7877.85 6755.81,7877.85 v4(6830.71,7952.76) ; C316.2@7458.66,7933.07 7498.03,7893.7 v1(7509.84,7893.7)
VSENSE_BAT: R316.2 R317.1 U315.12 | length 2916.4
  Top Layer w7.87: R316.2@6339.57,9991.14 v1(6339.57,10040.35) R317.1@6339.57,10089.57 ; v1(7059.67,8221.09) 7153.54,8127.22 U315.12@7153.54,8017.72
  Bottom Layer w7.87: v1(6339.57,10040.35) 6339.57,9967.52 6146.96,9774.92 6146.96,9463.27 6204.72,9405.51 6204.72,8566.31 6497.41,8273.62 6906.13,8273.62 6958.66,8221.09 v1(7059.67,8221.09)
VSENSE_X+: R302_X+.1 R303_X+.2 U315.64 | length 5577
  Top Layer w7.87: U315.64@7564.96,7952.76 7564.96,8169.55 7580.45,8185.04 9083.06,8185.04 9130.31,8232.28 10244.6,8232.28 10291.84,8279.53 11406.13,8279.53 11453.37,8326.77 12374.02,8326.77 12401.57,8354.33 12401.57,8645.67 R302_X+.1@12358.27,8688.98 R303_X+.2@12358.27,8594.49
VSENSE_X-: R302_X-.1 R303_X-.2 U315.6 | length 2213.1
  Top Layer w7.87: U315.6@7342.52,8017.72 7342.52,8206.95 7462.34,8326.77 8830.71,8326.77 8858.27,8354.33 8858.27,8389.76 8858.27,8645.67 R302_X-.1@8814.96,8688.98 R303_X-.2@8814.96,8594.49
VSENSE_Y+: R302_Y+.1 R303_Y+.2 U315.2 | length 4421.6
  Top Layer w7.87: U315.2@7468.5,8017.72 7468.5,8159.71 7541.08,8232.28 7543.31,8232.28 9063.49,8232.28 9110.74,8279.53 10225.03,8279.53 10272.27,8326.77 11192.91,8326.77 11220.47,8354.33 11220.47,8645.67 R302_Y+.1@11177.17,8688.98 R303_Y+.2@11177.17,8594.49
VSENSE_Y-: R302_Y-.1 R303_Y-.2 U315.8 | length 1068.8
  Top Layer w7.87: U315.8@7279.53,8017.72 7279.53,8230.57 7422.97,8374.02 7635.21,8374.02 7677.17,8415.97 7677.17,8641.73 R302_Y-.1@7633.86,8685.04 ; R303_Y-.2@7633.86,8594.49 R302_Y-.1@7633.86,8685.04 ; R302_Y-.1@7633.86,8688.98 R302_Y-.1@7633.86,8685.04
VSENSE_Z+: R302_Z+.1 R303_Z+.2 U315.4 | length 3317.4
  Top Layer w7.87: U315.4@7405.51,8017.72 7405.51,8183.33 7501.71,8279.53 7503.94,8279.53 9043.92,8279.53 9091.17,8326.77 10011.81,8326.77 10039.37,8354.33 10039.37,8645.67 R302_Z+.1@9996.06,8688.98 R303_Z+.2@9996.06,8594.49
VSENSE_Z-: R302_Z-.1 R303_Z-.2 U315.10 | length 1394.1
  Top Layer w7.87: R303_Z-.2@6452.76,8594.49 R302_Z-.1@6452.76,8685.04 ; R302_Z-.1@6452.76,8688.98 R302_Z-.1@6452.76,8685.04 ; U315.10@7216.54,8017.72 7216.54,8220.47 7094.49,8342.52 6555.12,8342.52 6496.06,8401.57 6496.06,8641.73 R302_Z-.1@6452.76,8685.04
pads on no net: ?.1 FLATSAT.2 FLATSAT.4 PDI311.3 PDI311.4 U311.1 U312.10 U314.5 U314.12 U315.18 U315.19 U315.40 U315.41 U315.42 U315.43 U315.55 U317.10

## Polygon pours and split planes (outlines as drawn)
NetC306_X+_1 on Top Layer "Top Solder-No Net" (solid, pour order 23): 7137.8,9922.24 13476.38,9922.24 13476.38,9831.69 13043.31,9831.69 13043.31,9851.38 12295.28,9851.38 12295.28,9835.63 11862.2,9835.63 11862.2,9851.38 11114.17,9851.38 11114.17,9835.63 10681.1,9835.63 10681.1,9851.38 9933.07,9851.38 9933.07,9835.63 9500,9835.63 9500,9851.38 8751.97,9851.38 8751.97,9835.63 8318.9,9835.63 8318.9,9851.38 7570.87,9851.38 7570.87,9835.63 7137.8,9835.63 7137.8,9922.24
NetC306_X+_1 on Top Layer "Top Solder-No Net" (solid, pour order 22): 7137.8,9299.21 7275.44,9299.21 7275.44,9372.8 7275.59,9372.97 7275.74,9373.14 7570.87,9373.14 7570.87,9724.41 7137.8,9724.41
NetC306_X+_1 on Top Layer "Top Solder-No Net" (solid, remove dead copper, pour order 36): 7137.8,9283.46 7275.59,9283.46 7275.59,9372.65 7275.44,9372.8 7275.78,9373.14 7570.87,9373.14 7570.87,9842.52 7137.8,9842.52
NetC306_X+_1 on Top Layer "Top Solder-No Net" (solid, remove dead copper, pour order 35): 8318.9,9283.46 8456.69,9283.46 8456.69,9372.65 8456.54,9372.8 8456.88,9373.14 8751.97,9373.14 8751.97,9842.52 8318.9,9842.52
NetC306_X+_1 on Top Layer "Top Solder-No Net" (solid, remove dead copper, pour order 34): 9500,9283.46 9637.8,9283.46 9637.8,9372.65 9637.64,9372.8 9637.98,9373.14 9933.07,9373.14 9933.07,9842.52 9500,9842.52
NetC306_X+_1 on Top Layer "Top Solder-No Net" (solid, remove dead copper, pour order 33): 10681.1,9283.46 10818.9,9283.46 10818.9,9372.65 10818.74,9372.8 10819.08,9373.14 11114.17,9373.14 11114.17,9842.52 10681.1,9842.52
NetC306_X+_1 on Top Layer "Top Solder-No Net" (solid, remove dead copper, pour order 32): 11862.2,9283.46 12000,9283.46 12000,9372.65 11999.85,9372.8 12000.19,9373.14 12295.28,9373.14 12295.28,9842.52 11862.2,9842.52
NetC306_X+_1 on Top Layer "Top Solder-No Net" (solid, remove dead copper, pour order 31): 13043.31,9283.46 13181.1,9283.46 13181.1,9372.65 13180.95,9372.8 13181.29,9373.14 13476.38,9373.14 13476.38,9842.52 13043.31,9842.52
GND on Top Layer "Top Solder-No Net" (solid, remove dead copper, pour order 42): 6401.57,9173.23 6397.64,9173.23 6397.64,9842.52 7129.7,9842.52 7129.77,9842.46 7129.77,9283.46 7035.43,9283.46 7035.43,9244.56 7035.43,9228.35 7027.56,9220.47 6858.27,9220.47 6829.53,9191.73 6829.53,9112.2 6675.2,9112.2 6614.17,9173.23 6401.57,9173.23
GND on Top Layer "Top Solder-No Net" (solid, remove dead copper, pour order 41): 7582.68,9173.23 7578.74,9173.23 7578.74,9842.52 8310.81,9842.52 8310.87,9842.46 8310.87,9283.46 8216.54,9283.46 8216.54,9244.56 8216.54,9228.35 8208.66,9220.47 8039.37,9220.47 8010.63,9191.73 8010.63,9112.2 7856.3,9112.2 7795.28,9173.23 7582.68,9173.23
GND on Top Layer "Top Solder-No Net" (solid, remove dead copper, pour order 40): 8763.78,9173.23 8759.84,9173.23 8759.84,9842.52 9491.91,9842.52 9491.97,9842.46 9491.97,9283.46 9397.64,9283.46 9397.64,9244.56 9397.64,9228.35 9389.76,9220.47 9220.47,9220.47 9191.73,9191.73 9191.73,9112.2 9037.4,9112.2 8976.38,9173.23 8763.78,9173.23
GND on Top Layer "Top Solder-No Net" (solid, remove dead copper, pour order 39): 9944.88,9173.23 9940.94,9173.23 9940.94,9842.52 10673.01,9842.52 10673.07,9842.46 10673.07,9283.46 10578.74,9283.46 10578.74,9244.56 10578.74,9228.35 10570.87,9220.47 10401.57,9220.47 10372.83,9191.73 10372.83,9112.2 10218.5,9112.2 10157.48,9173.23 9944.88,9173.23
GND on Top Layer "Top Solder-No Net" (solid, remove dead copper, pour order 38): 11125.98,9173.23 11122.05,9173.23 11122.05,9842.52 11854.11,9842.52 11854.18,9842.46 11854.18,9283.46 11759.84,9283.46 11759.84,9244.56 11759.84,9228.35 11751.97,9220.47 11582.68,9220.47 11553.94,9191.73 11553.94,9112.2 11399.61,9112.2 11338.58,9173.23 11125.98,9173.23
GND on Top Layer "Top Solder-No Net" (solid, remove dead copper, pour order 37): 12307.09,9173.23 12303.15,9173.23 12303.15,9842.52 13035.21,9842.52 13035.28,9842.46 13035.28,9283.46 12940.95,9283.46 12940.94,9283.46 12940.94,9244.56 12940.94,9228.35 12933.07,9220.47 12763.78,9220.47 12735.04,9191.73 12735.04,9112.2 12580.71,9112.2 12519.69,9173.23 12519.68,9173.23 12307.09,9173.23
GND on Bottom Layer "Top Solder-No Net" (solid, remove dead copper, pour order 25): 12874.02,9724.41 12893.7,9704.72 12893.7,9320.87 12874.02,9301.18 12440.94,9301.18 12421.5,9320.63 12421.5,9704.49 12421.26,9704.72 12440.94,9724.41
GND on Bottom Layer "Top Solder-No Net" (solid, remove dead copper, pour order 26): 11692.91,9724.41 11712.6,9704.72 11712.6,9320.87 11692.91,9301.18 11259.84,9301.18 11240.4,9320.63 11240.4,9704.49 11240.16,9704.72 11259.84,9724.41
GND on Bottom Layer "Top Solder-No Net" (solid, remove dead copper, pour order 27): 10511.81,9724.41 10531.5,9704.72 10531.5,9320.87 10511.81,9301.18 10078.74,9301.18 10059.29,9320.63 10059.29,9704.49 10059.06,9704.72 10078.74,9724.41
GND on Bottom Layer "Top Solder-No Net" (solid, remove dead copper, pour order 28): 9330.71,9724.41 9350.39,9704.72 9350.39,9320.87 9330.71,9301.18 8897.64,9301.18 8878.19,9320.63 8878.19,9704.49 8877.95,9704.72 8897.64,9724.41
GND on Bottom Layer "Top Solder-No Net" (solid, remove dead copper, pour order 29): 8149.61,9724.41 8169.29,9704.72 8169.29,9320.87 8149.61,9301.18 7716.54,9301.18 7697.09,9320.63 7697.09,9704.49 7696.85,9704.72 7716.54,9724.41
GND on Bottom Layer "Top Solder-No Net" (solid, remove dead copper, pour order 30): 6968.5,9724.41 6988.19,9704.72 6988.19,9320.87 6968.5,9301.18 6535.43,9301.18 6515.99,9320.63 6515.99,9704.49 6515.75,9704.72 6535.43,9724.41
F_SYNC on Bottom Layer "Top Solder-No Net" (solid, remove dead copper, pour order 24): 6515.99,9320.87 6515.99,9320.63 6535.43,9301.18
GND on Internal Plane 1 (split plane): 13562.58,7205.14 5728.76,7205.14 5728.76,10511.4 13562.58,10511.4
3V3 on Internal Plane 2 (split plane): 13562.58,7205.14 5728.76,7205.14 5728.76,10511.4 13562.58,10511.4

## Silkscreen, mask and mechanical layers (free items; w line width, h text height)
Top Overlay:
  lines w10: 11614.17,7322.83 11614.17,7519.69 13011.81,7519.69 13011.81,7322.83 11614.17,7322.83
  text "PC0" at 5800,8485.63 h39.37
  text "SDA" at 6100,8485.63 h39.37
  text "PC1" at 5800,8385.63 h39.37
  text "SCL" at 6100,8385.63 h39.37
  text "PD0" at 5800,8285.63 h39.37
  text "PD1" at 5800,8185.63 h39.37
  text "PD2" at 5800,8085.63 h39.37
  text "PD3" at 5800,7985.63 h39.37
  text "PD4" at 5800,7885.63 h39.37
  text "PD5" at 5800,7785.63 h39.37
  text "F_SYNC" at 8728.35,7720.47 h39.37
  text "PD6" at 5800,7685.63 h39.37
  text "GND" at 8826.77,7614.17 h39.37
  text "PD7" at 5800,7585.63 h39.37
  text "BLUEsat BCR Prototype 2.0 July 2012" at 11653.54,7440.94 h39.37
  text "Design by Thomas Fisk" at 11653.54,7362.2 h39.37
Mechanical 1:
  the board outline again, w10
  text "Board Outline, 200mm x 85mm" at 11909.45,10629.92 h60

## Text inside footprints (layer, text, board x,y; h text height)
3V3_EXT: Top Overlay "+    -" at 13562.99,7854.33 h39.37 r90
BATTERY: Top Overlay "+    -" at 5728.35,9665.35 h39.37 r270
FLATSAT: Top Overlay "16" at 10897.8,7461.89 h50; Top Overlay "15" at 10897.8,7361.89 h50; Top Overlay "1" at 10037.8,7361.89 h50; Top Overlay "2" at 10037.8,7461.89 h50
LOAD: Top Overlay "+    -" at 5728.35,8976.38 h39.37 r270
PANEL_X+: Top Overlay "+    -" at 12716.54,10511.81 h39.37 r180
PANEL_X-: Top Overlay "+    -" at 9173.23,10511.81 h39.37 r180
PANEL_Y+: Top Overlay "+    -" at 11535.43,10511.81 h39.37 r180
PANEL_Y-: Top Overlay "+    -" at 7992.13,10511.81 h39.37 r180
PANEL_Z+: Top Overlay "+    -" at 10354.33,10511.81 h39.37 r180
PANEL_Z-: Top Overlay "+    -" at 6811.02,10511.81 h39.37 r180
PDI311: Top Overlay "1" at 8444.88,7460.63 h50